# Altium PCB LEM5010.PcbDoc
Units mm, origin at the board's own origin, x right, y up, seen from the top; angles counter-clockwise.
Board outline 17.3 x 11 mm, 2 copper layers (Top Layer, Bottom Layer); 28 components, 52 nets, 96 pads, 41 vias.
Unrouted connection lines stored in the file: 1.
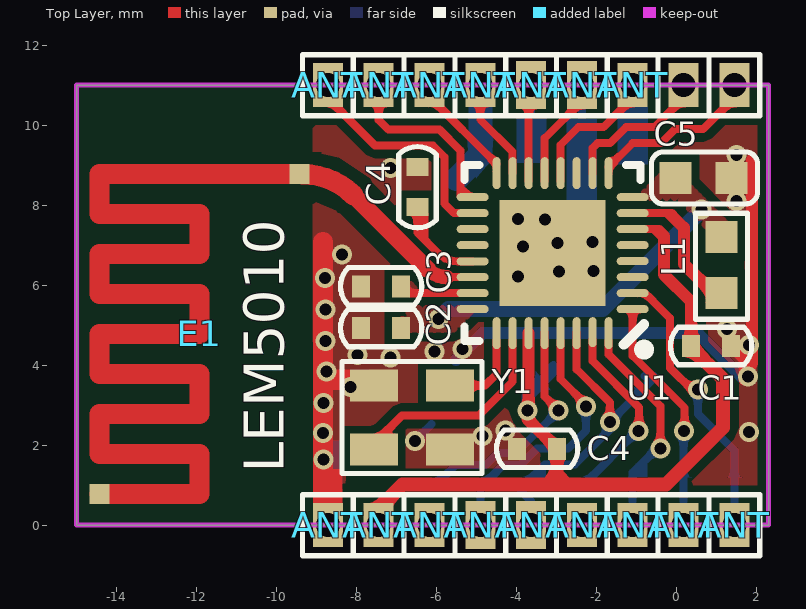
[diagram p0: Top Layer view]
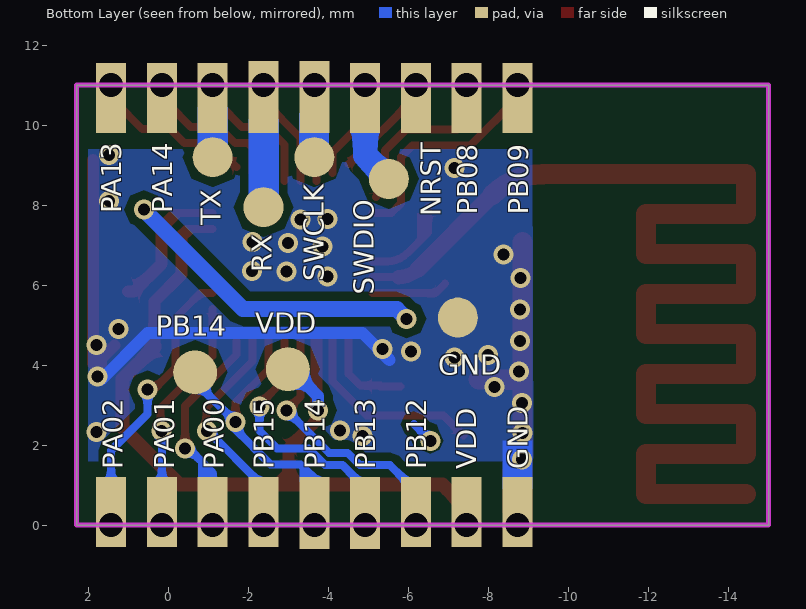
[diagram p1: Bottom Layer view, seen from below]

## Layer stack, top to bottom
Top Solder: solder mask 0.0102, Solder Resist, Dk 3.5
Top Layer: signal copper 0.0356
Dielectric1: dielectric 0.32, FR-4, Dk 4.8
Bottom Layer: signal copper 0.0356
Bottom Solder: solder mask 0.0102, Solder Resist, Dk 3.5

## Board outline
-15,0 2.3,0 2.3,11 -15,11

## Design rules (kind name [scope] priority, off if disabled: settings)
Clearance Clearance_3 [All vs InNet('NetR1_1')] p1: gap=0.3
Clearance Clearance_2 [All vs InNet('NetE1_1')] p2: gap=0.3
Clearance [All vs InNet('ANT')] p3: gap=0.3
Clearance Clearance_1 [All] p4: gap=0.2
DiffPairsRouting [All] p1: maxlimit=0.254 minlimit=0.254 mostfreqgap=0.4 toplayer_minwidth=0.381 toplayer_maxwidth=0.381 toplayer_prefwidth=0.381 bottomlayer_prefgap=0.254 bottomlayer_minwidth=0.381 bottomlayer_maxwidth=0.381 bottomlayer_prefwidth=0.381 maxuncoupledlength=12.7
HoleToHoleClearance [All] p1: gap=0 allowstackedmicrovias=TRUE
MinimumSolderMaskSliver [All] p1: minsoldermaskwidth=0
PolygonConnect PolygonConnect_1 [isvia] p1: connectstyle=Direct reliefconductorwidth=0.254 reliefentries=4 polygonreliefangle="90 Angle" airgapwidth=0.254
PolygonConnect [All] p2: connectstyle=Direct reliefconductorwidth=0.254 reliefentries=4 polygonreliefangle="90 Angle" airgapwidth=0.254
RoutingVias [All] p1: holewidth=0.3 width=0.5 viastyle="Through Hole" minholewidth=0.3 minwidth=0.5 maxholewidth=0.3 maxwidth=0.5
SilkToSilkClearance [All] p1: silktosilkclearance=0
SilkToSolderMaskClearance SilkscreenOverComponentPads [IsPad] p1: minsilkscreentomaskgap=0 clearancetoexposedcopper=TRUE
SolderMaskExpansion [All] p1: expansion=0.102
Width [All] p1: maxlimit=1 minlimit=0.12 preferedwidth=0.254
25 further rules are at their usual default settings.

## Components (designator, comment, footprint, x,y, rotation, side; value= is the part's Value field where it differs from the comment)
ANT "" PAD_1*0.7_0.6H#1 -1.1,11 r90 top
ANT "" PAD_1*0.7_0.6H#2 -2.37,11 r90 top
ANT "" PAD_1*0.7_0.6H#2 -3.64,11 r90 top
ANT "" PAD_1*0.7_0.6H#1 -4.91,11 r90 top
ANT "" PAD_1*0.7_0.6H#1 -6.18,11 r90 top
ANT "" PAD_1*0.7_0.6H#1 -7.45,11 r90 top
ANT "" PAD_1*0.7_0.6H#1 -8.72,11 r90 top
ANT "" PAD_1*0.7_0.6H#1 -1.1,0 r270 top
ANT "" PAD_1*0.7_0.6H#1 -2.37,0 r270 top
ANT "" PAD_1*0.7_0.6H#2 -3.64,0 r270 top
ANT "" PAD_1*0.7_0.6H#2 -4.91,0 r270 top
ANT "" PAD_1*0.7_0.6H#1 -6.18,0 r270 top
ANT "" PAD_1*0.7_0.6H#1 -7.45,0 r270 top
ANT "" PAD_1*0.7_0.6H#1 -8.72,0 r270 top
ANT "" PAD_1*0.7_0.6H#1 0.17,0 r270 top
ANT "" PAD_1*0.7_0.6H#1 1.44,0 r270 top
ANT "" PAD_1*0.7_0.6H#1 0.17,11 r270 top
ANT "" PAD_1*0.7_0.6H#1 1.44,11 r270 top
C1 "1uF" C0402 0.86,4.48 r0 top
C2 "1uF" C0402 -7.39,4.93 r0 top
C3 "1uF/NC" C0402 -7.39,5.97 r0 top
C4 "1uF" C0402 -6.48,8.45 r270 top
C4 "1uF" C0402 -3.49,1.91 r180 top (schematic designator C1)
C5 "4.7uF" C_0603(SMALL) 0.67,8.68 r0 top (schematic designator C12)
E1 "ANT1" ANT-03 -9.43,8.78 r0 top
L1 "10uH" L_0603 1.12,6.5 r90 top
U1 "LE5010_QFN32" VQFN-32_L4.0-W4.0-P0.40-TL-EP -3.1,6.8 r180 top
Y1 "16MHZ" XTAL_3225 -6.62,2.69 r180 top

## Footprints (in the part's own frame and the unit in brackets; to place one, negate y for a bottom-side part, rotate by r counter-clockwise, add the part's x,y. Pads: shape width x height; smd on the part's side, far side on the other; paste and mask are expansions set on the pad)
ANT-03 [mm]
  rect 0.5x0.5 smd mask+0.01: 0(-5,-8) 1(0,0)
  Top Layer lines w0.5: -5,-8 -2.5,-8 -2.5,-7 -5,-7 -5,-6 -2.5,-6 -2.5,-5 -5,-5 -5,-4 -2.5,-4 -2.5,-3 -5,-3 -5,-2 -2.5,-2 -2.5,-1 -5,-1 -5,0 -3,0 0,0
C0402 [mm]
  rect 0.45x0.55 smd mask+0.01: 1(-0.5,0) 2(0.5,0)
  silkscreen extent -1.01,-0.47 1.01,0.47
C_0603(SMALL) [mm]
  rect 0.8x0.8 smd mask+0.01: 1(-0.7,0) 2(0.7,0)
  silkscreen extent -1.3,-0.65 1.35,0.65
L_0603 [mm]
  rect 0.8x0.8 smd mask+0.01: 1(-0.7,0) 2(0.7,0)
  silkscreen extent -1.35,-0.65 1.3,0.65
PAD_1*0.7_0.6H#1 [mm]
  rect 1.1x0.75 hole 0.6 unplated mask+0.01: 1(0,0)
  silkscreen extent -0.76,-0.64 0.76,0.64
PAD_1*0.7_0.6H#2 [mm]
  rect 1.2x0.75 hole 0.6 unplated mask+0.01: 1(0,0)
  silkscreen extent -0.76,-0.64 0.76,0.64
VQFN-32_L4.0-W4.0-P0.40-TL-EP [mm]
  oval 0.8x0.2 smd mask+0.01: 1(-2,1.4) 2(-2,1) 3(-2,0.6) 4(-2,0.2) 5(-2,-0.2) 6(-2,-0.6) 7(-2,-1) 8(-2,-1.4) 17(2,-1.4) 18(2,-1) 19(2,-0.6) 20(2,-0.2) 21(2,0.203) 22(2,0.6) 23(2,1) 24(2,1.4)
  oval 0.2x0.8 smd mask+0.01: 9(-1.4,-2) 10(-1,-2) 11(-0.6,-2) 12(-0.2,-2) 13(0.2,-2) 14(0.6,-2) 15(1,-2) 16(1.4,-2) 25(1.4,2) 26(1,2) 27(0.6,2) 28(0.2,2) 29(-0.2,2) 30(-0.6,2) 32(-1.4,2)
  oval 0.2x0.75 smd mask+0.01: 31(-1,1.975)
  rect 2.65x2.65 smd mask+0.01: 33(0,0)
  silkscreen extent -2.29,-2.2 2.2,2.41
XTAL_3225 [mm]
  rect 1.2x0.8 smd mask+0.01: 1(-0.95,-0.8) 2(0.95,-0.8) 3(0.95,0.8) 4(-0.95,0.8)
  silkscreen extent -1.75,-1.4 1.75,1.4

## Part data
ANT ANT ANT ANT ANT ANT ANT ANT ANT ANT ANT ANT ANT ANT ANT ANT ANT ANT: library part TESTPOINT
C1 C2 C3 C4 C4: library part CAP, "Capacitor"
C5: library part CAP
L1: library part Inductance
Y1: library part CRYSTAL, "Crystal"

## Free pads (board coordinates)
  rect 0.75x1.2 smd far side mask+0.01: 0(-8.72,0.6) 0(-8.72,10.4) 0(-7.45,0.6) 0(-7.45,10.4) 0(-6.18,0.6) 0(-6.18,10.4) 0(-4.91,0.6) 0(-4.91,10.4) 0(-3.64,0.6) 0(-3.64,10.4) 0(-2.37,0.6) 0(-2.37,10.4) 0(-1.1,0.6) 0(-1.1,10.4) 0(0.17,0.6) 0(0.17,10.4) 0(1.44,0.6) 0(1.44,10.4)
  round 1.1 smd far side: 0(-0.66,3.82) 2(-2.98,3.9)
  round 1 smd far side: 3(-7.23,5.19) 3(-5.502,8.655) 3(-3.64,9.2) 3(-2.37,7.95) 3(-1.1,9.2)

## Via types
v1: diameter 0.5, hole 0.3, Top Layer to Bottom Layer, 41 vias

## Nets (pads, with @x,y where several pads share a name; then routed paths per layer and width w, separated by ;. In a path a pad name is that pad's centre, name@x,y a point inside that pad or via, vN(x,y) a via of type N, cw(c..) or ccw(c..) an arc to the next point about the centre after c; other vN are vias at no path point)
ANT: 
AVDD: pad.0@-7.45,0.6
GND: ANT.1@-8.72,0 C1.2 C2.1 C3.1 C4.1@-6.48,8.95 C4.2@-3.99,1.91 C5.2 pad.0@-8.72,0.6 pad.3@-7.23,5.19 U1.33 Y1.2 Y1.4 | length 22.2
  Top Layer w0.3: C1.2@1.36,4.49 1.365,4.485 1.69,4.16 v1@1.69,3.64 ; 1.86,4.01 1.887,4.037 1.887,9.133
  Top Layer w0.5: -8.84,7.08 -8.84,6.176 v1(-8.84,2.31) -8.84,0.12 ANT.1@-8.72,0 ; v1@-8.76,3.64 Y1.2@-7.75,3.64
  Bottom Layer w0.3: -5.52,4.13 -4.85,4.8 0.53,4.8 v1@1.69,3.64
  other v1: -8.83,1.646 -6.54,2.11 -4.85,2.23 1.81,2.33 -4.28,2.37 -8.83,3.052 -8.15,3.46 1.78,3.72 -8.76,3.842 -7.15,4.19 -7.98,4.26 -6.06,4.34 -5.35,4.41 1.81,4.51 -8.78,4.6 1.26,4.91 -8.78,5.39 -8.79,6.176 -3.97,6.22 -2.94,6.34 -2.08,6.36 -8.37,6.77 -3.84,6.97 -2.98,7.05 -2.1,7.08 -3.29,7.64 -3.97,7.65 1.49,8.1 -7.15,8.93 1.49,9.25
LED1: 
LED2: 
NetC3_2: C3.2 U1.23 | length 1.9
  Top Layer w0.2: C3.2@-6.912,6.042 -6.67,5.8 U1.23
NetC4_2: C4.2@-6.48,7.95 U1.21 | length 2.3
  Top Layer w0.2: C4.2@-6.48,7.95 -6.48,7.314 -5.966,6.801 ; -5.965,6.802 ccw(c-5.47,7.297) -5.47,6.597 U1.21
NetE1_1: E1.0
NetL1_2: L1.1 U1.7 | length 3.5
  Top Layer w0.2: U1.7 -0.163,7.8 -0.123,7.76
  Top Layer w0.3: -0.133,7.75 0.18,7.437 0.18,6.53 0.87,5.84 L1.1@1.02,5.84
NetR1_1: E1.1 U1.22 | length 5.2
  Top Layer w0.2: -5.743,6.2 U1.22
  Top Layer w0.356: -6.238,6.405 ccw(c-5.743,6.9) -5.743,6.2
  Top Layer w0.432: -8.081,8.248 -6.238,6.405
  Top Layer w0.508: E1.1@-9.347,8.773 cw(c-9.347,6.981) -8.081,8.248
NRST: ANT.1@-6.18,11 pad.0@-6.18,10.4 U1.16 | length 2.4
  Top Layer w0.2: ANT.1@-6.18,10.704 U1.16@-4.5,9.024
PA00: ANT.1@-1.1,0 pad.0@-1.1,0.6 U1.32 | length 4.9
  Top Layer w0.2: U1.32@-1.7,4.6 -1.7,4.27 -0.41,2.98 v1(-0.41,1.92)
  Bottom Layer w0.2: pad.0@-1.1,0.6 -1.1,1.316 -0.496,1.92 v1(-0.41,1.92)
PA0: 
PA01: ANT.1@0.17,0 pad.0@0.17,0.6 U1.1 | length 5.4
  Top Layer w0.2: U1.1 -1.1,4.236 0.2,2.936 0.2,2.37 v1(0.18,2.35)
  Bottom Layer w0.2: pad.0@0.17,0.6 0.17,2.34 v1(0.18,2.35)
PA1: 
PA02: ANT.1@1.44,0 pad.0@1.44,0.6 U1.2 | length 6.6
  Top Layer w0.2: U1.2 -0.79,5.8 -0.165,5.175 -0.165,3.933 0.418,3.35 0.458,3.39 v1(0.53,3.39)
  Bottom Layer w0.2: v1(0.53,3.39) 0.53,2.778 1.44,1.868 1.44,0.6 ANT.1@1.44,0.55
PA2: 
PA3: 
PA4: 
PA5: 
PA6: 
PA07: U1.3
PA7: 
PA08: U1.4
PA09: U1.5
PA13: ANT.1@1.44,11 pad.0@1.44,10.4 U1.9 | length 4.4
  Top Layer w0.2: U1.9@-1.7,8.949 -1.099,9.549 -0.395,9.549 -0.044,9.9 0.66,9.9 ANT.1@1.44,10.68 ; ANT.1@1.44,10.57 ANT.1@1.44,10.68 ; ANT.1@1.44,11 ANT.1@1.44,10.68 ; ANT.1@1.5,10.74 ANT.1@1.44,10.68
PA14: ANT.1@0.17,11 pad.0@0.17,10.4 U1.10 | length 3.7
  Top Layer w0.2: U1.10 -2.1,9.43 -1.98,9.55 -1.664,9.55 -1.265,9.949 -0.561,9.949 0.17,10.68 ANT.1@0.17,11
PA15: U1.11
PB08: ANT.1@-7.45,11 pad.0@-7.45,10.4 U1.17 | length 4
  Top Layer w0.2: ANT.1@-7.45,10.5 -7.45,10.13 -7.21,9.89 -5.931,9.89 -5.41,9.369 -5.41,8.66 -5.41,8.433 U1.17@-5.177,8.2
PB09: ANT.1@-8.72,11 pad.0@-8.72,10.4 U1.18 | length 5.5
  Top Layer w0.2: ANT.1@-8.72,10.67 -7.54,9.49 -6.097,9.49 -5.81,9.203 -5.81,8.284 -5.81,8.044 -5.566,7.8 U1.18
PB10: U1.19
PB11: U1.20
PB12: ANT.1@-6.18,0 pad.0@-6.18,0.6 U1.28 | length 5.7
  Top Layer w0.2: U1.28 -3.3,3.22 v1(-2.95,2.87)
  Bottom Layer w0.2: pad.0@-5.89,1.14 -5.53,1.5 -4.78,1.5 -4.47,1.81 -4.01,1.81 v1(-2.95,2.87)
PB13: ANT.1@-4.91,0 pad.0@-4.91,0.6 U1.29 | length 6.8
  Top Layer w0.2: U1.29@-2.9,4.6 -2.9,3.65 -2.27,3.02 v1(-2.27,2.97)
  Bottom Layer w0.2: -6.54,2.11 -6.126,2.524 ; pad.0@-4.91,0.6 -4.91,0.94 -4.344,1.506 -3.908,1.506 -3.495,1.92 -2.712,1.92 -2.27,2.362 v1(-2.27,2.97) v1@-2.38,2.97
PB14: ANT.1@-3.64,0 pad.0@-0.66,3.82 pad.0@-3.64,0.6 U1.30 | length 7.8
  Top Layer w0.2: U1.30 -2.5,3.898 -1.67,3.068 v1(-1.67,2.58)
  Bottom Layer w0.2: ANT.1@-3.64,0.6 -3.89,0.85 -3.89,0.929 -3.299,1.52 -2.546,1.52 -1.67,2.396 v1(-1.67,2.58) -0.57,3.68 -0.57,3.73 pad.0@-0.8,3.73
PB15: ANT.1@-2.37,0 pad.0@-2.37,0.6 U1.31 | length 4.7
  Top Layer w0.2: U1.31@-2.1,4.625 -2.1,4.104 -0.94,2.944 -0.94,2.38 v1(-0.96,2.36)
  Bottom Layer w0.2: pad.0@-2.37,1.008 -2.333,1.008 -0.981,2.36 v1(-0.96,2.36)
PC2: 
PC3: 
PC4: 
PC5: 
PC6: 
PC7: 
RST_N: 
RX: ANT.1@-2.37,11 pad.0@-2.37,10.4 pad.3@-2.37,7.95 U1.13 | length 4.9
  Top Layer w0.2: U1.13@-3.3,8.6 U1.13 -3.3,9.676 -2.37,10.606 ANT.1@-2.37,10.637
  Bottom Layer w0.2: pad.3@-2.37,7.95 pad.0@-2.37,10.4
SWCLK: ANT.1@-3.64,11 pad.0@-3.64,10.4 pad.3@-3.64,9.2 U1.14 | length 3.9
  Top Layer w0.2: ANT.1@-3.87,10.77 ANT.1@-3.64,11 ; U1.14@-3.7,8.6 U1.14 ANT.1@-3.7,10.94
  Bottom Layer w0.2: pad.3@-3.64,9.2 pad.0@-3.64,10.4
SWDIO: ANT.1@-4.91,11 pad.0@-4.91,10.4 pad.3@-5.502,8.655 U1.15 | length 4.5
  Top Layer w0.2: ANT.1@-4.91,11 -4.91,10.136 -4.1,9.326 U1.15
  Bottom Layer w0.6: pad.3@-5.502,8.655 -4.91,9.246 pad.0@-4.91,10.4
TX: ANT.1@-1.1,11 pad.0@-1.1,10.4 pad.3@-1.1,9.2 U1.12 | length 4.7
  Top Layer w0.2: U1.12@-2.9,8.6 U1.12 -2.9,9.51 -2.46,9.95 -1.83,9.95 -1.1,10.68 ANT.1@-1.1,11
  Bottom Layer w0.2: pad.3@-1.1,9.2 pad.0@-1.1,10.4
VBAT: 
VDD: ANT.1@-7.45,0 C1.1 C4.1@-2.99,1.91 pad.2 U1.6 U1.27 | length 21.4
  Top Layer w0.2: U1.6 -0.49,7.4 -0.44,7.35
  Top Layer w0.3: v1(-3.73,2.87) -3.73,2.65 -2.99,1.91 -2.99,1.28 ; v1@-3.7,2.87 U1.27 ; -3.25,1.02 -2.99,1.28 ; -2.72,1.02 -2.98,1.28 -2.99,1.28 ; -0.44,7.35 -0.32,7.23 -0.32,6.266 0.36,5.586 C1.1@0.36,4.49
  Top Layer w0.35: ANT.1@-7.61,0.31 -7.56,0.31 -6.85,1.02 -3.25,1.02 ; -2.72,1.02 -0.266,1.02 1.155,2.441 1.155,3.649 0.36,4.444 C1.1 C1.1@0.36,4.49
  Bottom Layer w0.2: pad.2@-3.16,3.93 pad.2@-3.08,4.01
  Bottom Layer w0.3: v1(-3.73,2.87) -3.73,3.23 -3.06,3.9 pad.2
VDD15: C2.2 C5.1 L1.2 U1.8 U1.24 | length 7.7
  Bottom Layer w0.4: v1(-5.95,5.156) -5.706,5.4 -1.86,5.4 v1@0.59,7.85
  other v1: 0.62,7.89
XTALI: U1.26 Y1.3 | length 4.9
  Top Layer w0.2: Y1.3@-7.37,2.24 -6.87,2.74 -4.95,2.74 -4.1,3.59 U1.26@-4.1,4.62
XTALO: U1.25 Y1.1 | length 2.3
  Top Layer w0.15: U1.25@-4.5,4.6 U1.25@-4.5,4.62
  Top Layer w0.2: Y1.1@-5.8,3.47 -5.28,3.47 -5.3,3.49 -4.79,3.49 -4.5,3.78 -4.5,4.33 -4.5,4.6 U1.25@-4.5,4.62

## Polygon pours and split planes (outlines as drawn)
GND on Top Layer "Top Layer-No Net" (solid, remove dead copper, pour order 1106): -9.1,10.44 2.2,10.44 2.27,10.37 2.3,10.34 2.3,6.84 0.74,6.84 0.73,6.85 0.759,6.821 0.759,6.196 1.614,6.196 1.65,6.16 1.7,6.21 1.7,6.79 1.7,6.84 2.3,6.84 2.3,0.59 2.25,0.54 -9.16,0.54 -9.16,0.977 -9.09,1.047 -9.083,1.04 -7.66,1.04 -7.66,1.44 -7.7,1.48 -8.28,1.48 -8.28,1.04 -8.287,1.047 -9.09,1.047
VDD15 on Top Layer "TopLayer-E-4" (hatched 90Degree grid 0 track 0.2, remove dead copper, pour order 1008): -0.17,8.516 -0.09,8.436 -0.09,8.316 -0.082,8.316 0.328,7.906 1.101,7.133 1.141,7.133 1.141,7.37 0.741,7.77 -0.03,8.541 -0.03,8.73
VDD15 on Top Layer "TopLayer-E-4" (hatched 90Degree grid 0.2 track 0.2, remove dead copper, pour order 1007): 1.22,7.01 1.241,7.031 1.241,7.519 1.04,7.72 -0.14,8.9 -0.14,8.96 -0.15,8.96 -0.454,8.656 -0.91,8.2 -1,8.2 0.074,8.2 0.9,7.374 1.22,7.054 1.22,7.01
NetC3_2 on Top Layer "TopLayer-E-4" (hatched 90Degree grid 0 track 0.2, remove dead copper, pour order 1006): -6.16,5.8 -6.35,5.8 -6.46,5.8 -6.782,6.122 -6.854,6.05 -6.92,6.05 -6.67,5.8 -6.09,5.8
VDD15 on Top Layer "TopLayer-E-4" (hatched 90Degree grid 0.2 track 0.2, remove dead copper, pour order 1005): -5.1,5.4 -5.75,5.4 -6.59,5.4 -6.74,5.25 -6.92,5.07 -6.92,4.91 -5.59,4.91 -5.1,5.4
GND on Bottom Layer "Top Layer-No Net" (solid, remove dead copper, pour order 1104): -9.09,9.78 -9.07,9.8 2.25,9.8 2.25,1.2 2.23,1.18 -9.12,1.18

## Keep-outs
Keep-Out Layer:
  the board outline again, w0.127

## Other copper
Top Layer:
  rectangle net VDD: -3.46,0.84 -2.54,1.19
  rectangle net NRST: -4.61,9.024 -4.49,9.2
  rectangle net PA13: -1.7,9.14 -1.508,9.2
  rectangle net PB08: -5.5,8.194 -5.311,8.533
  rectangle net NetC4_2: -6.387,7.13 -6.21,7.81
  rectangle net GND: -9.09,0.3 -8.35,1.4
  region net VDD: -1.1,7.5 -0.44,7.5 -0.21,7.27 -0.32,7.16 -0.32,7.01 -0.71,7.4 -1.1,7.4
  region net NetL1_2: -1.1,7.9 -0.12,7.9 0.09,7.69 -0.004,7.596 -0.189,7.596 -0.189,7.599 -0.39,7.8 -0.46,7.8
  pour cut-out: 2.3,10 -9.39,10 -9.39,11 2.3,11
  pour cut-out: 2.3,0 -9.39,0 -9.39,1 2.3,1
  pour cut-out: -4.5,8.83 -1.68,8.83 -1.1,8.25 -1.1,5.44 -1.705,4.835 -4.495,4.835 -4.5,4.83 -5.08,5.41 -5.1,5.41 -5.1,8.21 -4.5,8.81
Bottom Layer:
  rectangle net PA00: -1.028,1.19 -0.73,1.548
  rectangle net PB14: -3.49,1.08 -3.27,1.44
  rectangle net GND: -9.09,0.91 -8.35,2.116
  rectangle net TX: -1.48,9.02 -0.72,10.45
  rectangle net RX: -2.76,7.93 -1.99,10.16
  rectangle net SWCLK: -4.01,9.06 -3.26,10.31
  pour cut-out: -9.39,0 2.3,0 2.3,1.604 -9.39,1.604
  pour cut-out: 2.3,11 -9.39,11 -9.39,9.4 2.3,9.4

## Silkscreen, mask and mechanical layers (free items; w line width, h text height)
Top Overlay:
  text "LEM5010" at -9.82,1.31 h1 r90
Bottom Overlay:
  text "PA14" at -0.09,7.8 h0.5 r270
  text "PA13" at 1.19,7.8 h0.5 r270
  text "PB09" at -8.99,7.76 h0.5 r270
  text "PB08" at -7.71,7.76 h0.5 r270
  text "NRST" at -6.8,7.72 h0.5 r270
  text "TX" at -1.3,7.5 h0.5 r270
  text "RX" at -2.58,6.32 h0.5 r270
  text "SWCLK" at -3.88,6.1 h0.5 r270
  text "SWDIO" at -5.12,5.76 h0.5 r270
  text "VDD" at -2.16,4.81 h0.5
  text "PB14" at 0.32,4.73 h0.5
  text "GND" at -6.74,3.76 h0.5
  text "GND" at -8.97,1.4 h0.5 r270
  text "VDD" at -7.69,1.4 h0.5 r270
  text "PB12" at -6.44,1.4 h0.5 r270
  text "PB13" at -5.16,1.4 h0.5 r270
  text "PB14" at -3.9,1.4 h0.5 r270
  text "PB15" at -2.62,1.4 h0.5 r270
  text "PA00" at -1.37,1.4 h0.5 r270
  text "PA01" at -0.14,1.4 h0.5 r270
  text "PA02" at 1.15,1.4 h0.5 r270